# Altium PCB temperature_logger_pcb_v1.PcbDoc
Units mm, origin at the board's own origin, x right, y up, seen from the top; angles counter-clockwise.
Board outline 26.5 x 50 mm, 2 copper layers (Top Layer, Bottom Layer); 41 components, 32 nets, 188 pads, 43 vias.
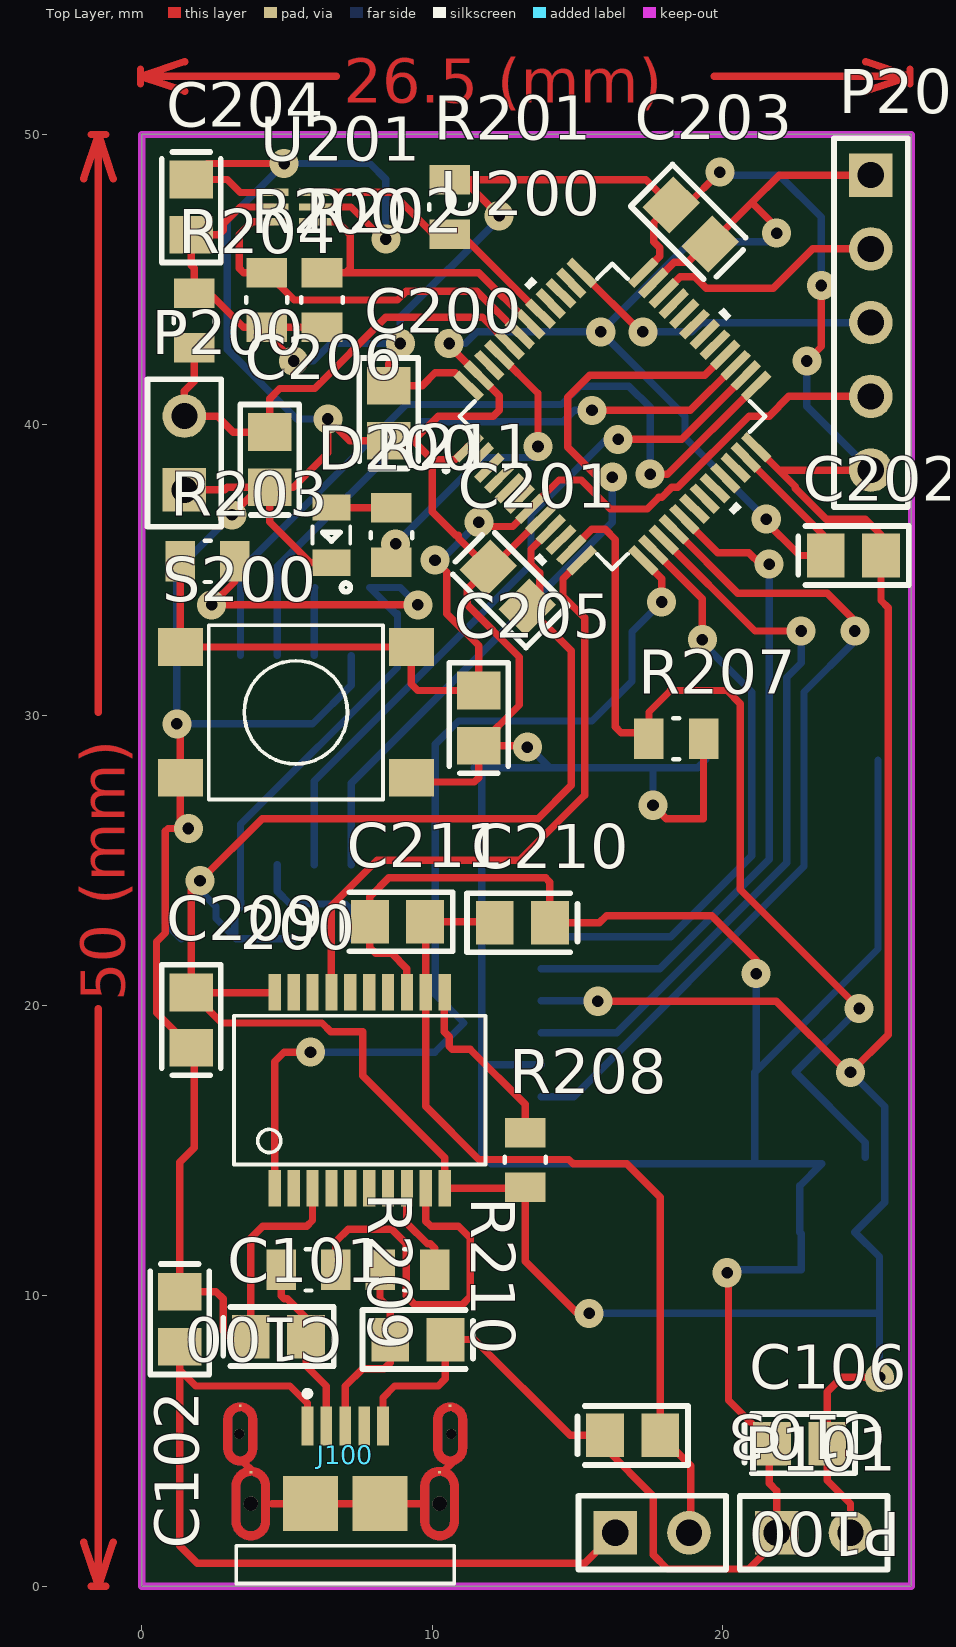
[diagram p0: Top Layer view]
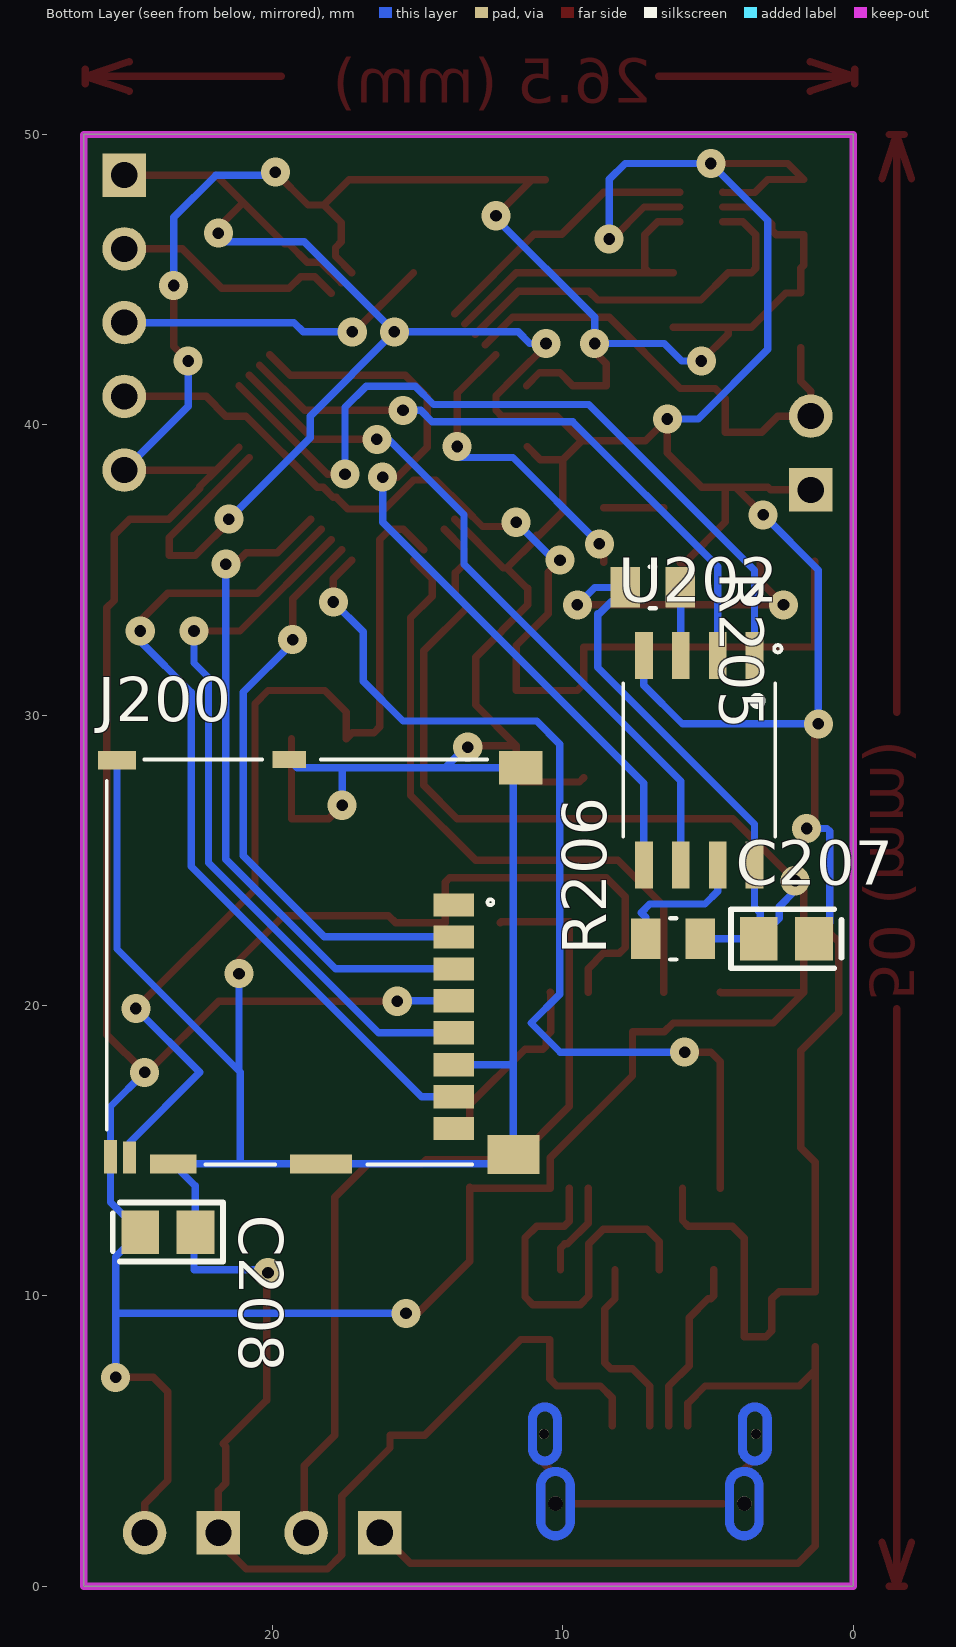
[diagram p1: Bottom Layer view, seen from below]

## Layer stack, top to bottom
Top Solder: solder mask 0.0102, Solder Resist, Dk 3.5
Top Layer: signal copper 0.0356
Dielectric 1: dielectric 0.32, FR-4, Dk 4.8
Bottom Layer: signal copper 0.0356
Bottom Solder: solder mask 0.0102, Solder Resist, Dk 3.5

## Board outline
0,0 0,50 26.5,50 26.5,0

## Design rules (kind name [scope] priority, off if disabled: settings)
Clearance [All] p1: gap=0.203 ignorepadtopadclearanceinfootprint=FALSE
PolygonConnect [All] p1: connectstyle=Relief reliefconductorwidth=0.254 reliefentries=4 polygonreliefangle="90 Angle" airgapwidth=0.254
RoutingVias [All] p1: holewidth=0.4 width=1 viastyle="Through Hole" minholewidth=0.3 minwidth=1 maxholewidth=0.711 maxwidth=1
SolderMaskExpansion [All] p1: expansion=0.102
Width [All] p1: maxlimit=0.381 minlimit=0.152 preferedwidth=0.254
30 further rules are at their usual default settings.

## Classes and differential pairs
component class 01_Power: C100 C101 C102 C103 C106 J100 P100 P101
component class 02_MCU: 200 C200 C201 C202 C203 C204 C205 C206 C207 C208 C209 C210 C211 D200 J200 P200 P201 R200 R201 R202 R203 R204 R205 R206 R207 R208 R209 R210 R211 S200 U200 U201 U202

## Components (designator, comment, footprint, x,y, rotation, side; value= is the part's Value field where it differs from the comment)
200 "FT231XS-R" SSOP20 7.5,17.089 r0 top
C100 "47 pF" C0805 9.5,8.5 r180 top
C101 "47 pF" C0805 4.7,8.6 r0 top
C102 "10 nF" C0805 1.3,9.2 r270 top
C103 "100 nF" C0805 16.9,5.2 r0 top
C106 "10 nF" C0805 22.65,4.915 r0 top
C200 "1000 pF" C0805 8.5,40.4 r90 top
C201 "1000 pF" C0805 12.6,34.4 r315 top
C202 "1000 pF" C0805 24.5,35.5 r0 top
C203 "1000 pF" C0805 18.9,46.9 r135 top
C204 "1000 pF" C0805 1.7,47.5 r270 top
C205 "1000 pF" C0805 11.6,29.9 r90 top
C206 "1000 pF" C0805 4.4,38.8 r90 top
C207 "1000 pF" C0805 2.3,22.3 r0 bottom
C208 "1000 pF" C0805 23.6,12.2 r180 bottom
C209 "100 nF" C0805 1.7,19.5 r90 top
C210 "1000 pF" C0805 13.1,22.854 r180 top
C211 "47 pF" C0805 8.802,22.889 r0 top
D200 "LGR971" D0805 6.525,36.2 r270 top value="Green LED"
J100 "USB_Micro_B" MicroUSB 7,2.85 r0 top value="USB Micro B"
J200 "MicroSD" MicroSD 18.5,21.5 r90 bottom
P100 "" HDR1X2 16.3,1.848 r0 top
P101 "" HDR1X2 21.86,1.847 r0 top
P200 "" HDR1X2 1.46,37.76 r90 top
P201 "" HDR1X5 25.1,48.6 r270 top
R200 "5 k" R0805 4.3,44.3 r90 top value=5k
R201 "5 k" R0805 10.6,47.5 r270 top value=5k
R202 "5 k" R0805 6.2,44.3 r90 top value=5k
R203 "1 k" R0805 2.265,35.3 r180 top value=1k
R204 "1 k" R0805 1.8,43.6 r270 top value=1k
R205 "1 k" R0805 6.9,34.4 r180 bottom value=1k
R206 "1 k" R0805 6.2,22.3 r0 bottom value=1k
R207 "10 k" R0805 18.4,29.189 r0 top value=10k
R208 "1 k" R0805 13.2,14.689 r90 top value=1k
R209 "27" R0805 5.737,10.9 r180 top
R210 "27" R0805 9.14,10.9 r180 top
R211 "1 k" R0805 8.592,36.2 r270 top value=1k
S200 "Switch_tactile" Tactile1 5.3,30.1 r180 top value=Switch_Tactile
U200 "STM32L053" LQFP48-7x7mm 16.2,40.289 r45 top value=STM32L053C8T6
U201 "TMP112" SOT563 5.225,47.5 r180 top value=TMP112AIDRLT
U202 "16MB_FLASH" 8-SOIC 5.3,28.45 r270 bottom value=MX25R1635FM2IH1

## Footprints (in the part's own frame and the unit in brackets; to place one, negate y for a bottom-side part, rotate by r counter-clockwise, add the part's x,y. Pads: shape width x height; smd on the part's side, far side on the other; paste and mask are expansions set on the pad)
8-SOIC [mm]
  rect 1.61x0.61 smd: 1(-3.605,1.905) 2(-3.605,0.635) 3(-3.605,-0.635) 4(-3.605,-1.905) 5(3.605,-1.905) 6(3.605,-0.635) 7(3.605,0.635) 8(3.605,1.905)
  silkscreen extent -3.97,-2.62 2.64,2.83
C0805 [mm] "Chip Capacitor; Body 2.0 x 1.2 mm (LxW typ)"
  rect 1.3x1.5 smd: 1(-0.95,0) 2(0.95,0)
  silkscreen extent -1.9,-1.02 1.91,1.02
D0805 [mm]
  rect 0.9x1.3 smd: A(-0.95,0) C(0.95,0)
  silkscreen extent -0.3,-0.65 1.95,0.65
HDR1X2 [mm] "Connector; Header; 2 Position"
  rect 1.5x1.5 hole 0.9: 1(0,0)
  round 1.5 hole 0.9: 2(2.54,0)
  silkscreen extent -1.27,-1.27 3.81,1.27
HDR1X5 [mm] "Connector; Header; 5 Position"
  rect 1.5x1.5 hole 0.9: 1(0,0)
  round 1.5 hole 0.9: 2(2.54,0) 3(5.08,0) 4(7.62,0) 5(10.16,0)
  silkscreen extent -1.27,-1.27 11.43,1.27
LQFP48-7x7mm [mm]
  rect 1.194x0.305 smd: 1(-4.25,2.75) 2(-4.25,2.25) 3(-4.25,1.75) 4(-4.25,1.25) 5(-4.25,0.75) 6(-4.25,0.25) 7(-4.25,-0.25) 8(-4.25,-0.75) 9(-4.25,-1.25) 10(-4.25,-1.75) 11(-4.25,-2.25) 12(-4.25,-2.75) 25(4.25,-2.75) 26(4.25,-2.25) 27(4.25,-1.75) 28(4.25,-1.25) 29(4.25,-0.75) 30(4.25,-0.25) 31(4.25,0.25) 32(4.25,0.75) 33(4.25,1.25) 34(4.25,1.75) 35(4.25,2.25) 36(4.25,2.75)
  rect 0.305x1.194 smd: 13(-2.75,-4.25) 14(-2.25,-4.25) 15(-1.75,-4.25) 16(-1.25,-4.25) 17(-0.75,-4.25) 18(-0.25,-4.25) 19(0.25,-4.25) 20(0.75,-4.25) 21(1.25,-4.25) 22(1.75,-4.25) 23(2.25,-4.25) 24(2.75,-4.25) 37(2.75,4.25) 38(2.25,4.25) 39(1.75,4.25) 40(1.25,4.25) 41(0.75,4.25) 42(0.25,4.25) 43(-0.25,4.25) 44(-0.75,4.25) 45(-1.25,4.25) 46(-1.75,4.25) 47(-2.25,4.25) 48(-2.75,4.25)
  silkscreen extent -5.43,-5.35 5.35,5.35, body extent 0,0 0.25,0.25, height 0.25
MicroSD [mm]
  rect 0.8x1.4 smd: 1(1.965,-4.75) 2(0.865,-4.75) 3(-0.235,-4.75) 4(-1.335,-4.75) 5(-2.435,-4.75) 6(-3.535,-4.75) 7(-4.635,-4.75) 8(-5.735,-4.75)
  rect 1.15x0.45 smd: 9(-6.7,7.075)
  rect 1.1x0.45 smd: 10(-6.725,6.415)
  rect 1.35x1.8 smd: 11(-6.625,-6.8)
  rect 0.65x2.14 smd: 12(-6.95,-0.17)
  rect 0.65x1.6 smd: 13(-6.95,4.91)
  rect 0.65x1.3 smd: 14(6.95,6.85)
  rect 0.6x1.15 smd: 15(6.975,0.925)
  rect 1.16x1.5 smd: 16(6.695,-7.05)
  silkscreen extent -6.98,-6.11 6.98,7.2
MicroUSB [mm]
  rect 0.4x1.35 smd: 1(-1.3,2.675) 2(-0.65,2.675) 3(0,2.675) 4(0.65,2.675) 5(1.3,2.675)
  round 0.35 hole 0.35 unplated: None(-3.65,2.4) None(3.65,2.4)
  round 0.5 hole 0.5 unplated: None(-3.25,0) None(3.25,0)
  rect 0.1x0.1 smd: S1(-3.25,1.08) S2(3.25,1.08) S3(-3.615,3.369) S6(3.615,3.369)
  rect 1.9x1.9 smd: S4(-1.2,0) S5(1.2,0)
  Top Layer region: 258 vertices and 0 holes, not listed, extent -3.91,-1.26 -2.59,1.26
  Top Layer region: 258 vertices and 0 holes, not listed, extent 2.59,-1.26 3.91,1.26
  Top Layer region: 258 vertices and 0 holes, not listed, extent -4.195,1.32 -3.035,3.48
  Top Layer region: 258 vertices and 0 holes, not listed, extent 3.035,1.32 4.195,3.48
  Bottom Layer region: 258 vertices and 0 holes, not listed, extent -3.91,-1.26 -2.59,1.26
  Bottom Layer region: 258 vertices and 0 holes, not listed, extent 2.59,-1.26 3.91,1.26
  Bottom Layer region: 258 vertices and 0 holes, not listed, extent -4.195,1.32 -3.035,3.48
  Bottom Layer region: 258 vertices and 0 holes, not listed, extent 3.035,1.32 4.195,3.48
  silkscreen extent -3.75,-2.75 3.75,3.89
R0805 [mil]
  rect 40x55 smd: 1(-37,0) 2(37,0)
  silkscreen extent -4,-28 4,28
SOT563 [mil]
  rect 44x10 smd: 1(-29,20) 2(-29,0) 3(-29,-20) 4(29,-20) 5(29,0) 6(29,20)
SSOP20 [mm]
  rect 0.42x1.25 smd: P$1(-2.925,-3.375) P$2(-2.275,-3.375) P$3(-1.625,-3.375) P$4(-0.975,-3.375) P$5(-0.325,-3.375) P$6(0.325,-3.375) P$7(0.975,-3.375) P$8(1.625,-3.375) P$9(2.275,-3.375) P$10(2.925,-3.375) P$11(2.925,3.375) P$12(2.275,3.375) P$13(1.625,3.375) P$14(0.975,3.375) P$15(0.325,3.375) P$16(-0.325,3.375) P$17(-0.975,3.375) P$18(-1.625,3.375) P$19(-2.275,3.375) P$20(-2.925,3.375)
  silkscreen extent -4.33,-2.56 4.33,2.56
Tactile1 [mm] "6 mm x 6 mm"
  rect 1.55x1.3 smd: 1(-3.975,2.25) 2(3.975,2.25) 3(-3.975,-2.25) 4(3.975,-2.25)
  silkscreen extent -3,-3 3,3

## Part data
200: "USB Full Speed to Full Handshake UART with USB Charger Detection", Package="SSOP-20 FTDI", Availability=Good, MF=FTDI,, MP=FT231XS-R, Price="1.80 USD", SnapEDA_Link=https://www.snapeda.com/parts/FT231XS-R/FTDI%2C%20Future%20Technology%20Devices%20International%20Ltd/view-part/?ref=snap
C100 C101 C211: library part Cap-47pF, "CAP CER 47PF 1KV C0G/NP0 0805", Manufacturer=KEMET, Manufacturer Part Number=C0805C470JDGACTU, Package=C0805, Digikey_link=https://www.digikey.com.au/product-detail/en/kemet/C0805C470JDGACTU/399-7157-1-ND/3439404, Price="0.62 AUD"
C102 C106: library part Cap-10nF, "CAP CER 10000PF 10V X7R 0805", Manufacturer="Wurth Electronics Inc.", Manufacturer Part Number=885012207011, Package=C0805, Digikey_link=https://www.digikey.com.au/product-detail/en/wurth-electronics-inc/885012207011/732-8021-1-ND/5454648, Price="0.15 AUD"
C103 C209: library part Cap-100nF, "CAP CER 0.1UF 50V X7R 0805", Manufacturer=KEMET, Manufacturer Part Number=C0805X104K5RACTU, Package=C0805, Digikey_link=https://www.digikey.com.au/product-detail/en/kemet/C0805X104K5RACTU/399-5330-1-ND/1842309, Price="0.46 AUD"
C200 C201 C202 C203 C204 C205 C206 C207 C208 C210: library part Cap-1000pF, "CAP CER 1000PF 100V X7R 0805", Manufacturer=KEMET, Manufacturer Part Number=C0805C102K1RACTU, Package=C0805, Digikey_link=https://www.digikey.com.au/product-detail/en/kemet/C0805C102K1RACTU/399-1148-2-ND/411147, Price="0.035 USD"
D200: "LED GREEN DIFFUSED 0805 SMD", Manufacturer="Osram Opto", Manufacturer Part Number="LG R971-KN-1", Package=LED0805, Digikey_link=https://www.digikey.com.au/product-detail/en/osram-opto-semiconductors-inc/LG-R971-KN-1/475-1410-2-ND/1227925, Price="0.09 USD"
J100: "USB - micro B USB 2.0 Receptacle Connector 5 Position Surface Mount, Right Angle; Through Hole", Manufacturer="TE Connectivity", Manufacturer Part Number=2040002-1, Package=USB-Micro-B, Digikey_link=https://www.digikey.com.au/product-detail/en/te-connectivity-amp-connectors/2040002-1/A108263CT-ND/4021990, Price="3.03 USD", Product_Type=Connector
J200: "MICRO SD PUSH PUSH LOW PROFILE TYPE", Manufacturer="TE Connectivity", Manufacturer Part Number=2201778-1, Digikey_link=https://www.digikey.com.au/product-detail/en/te-connectivity-amp-connectors/2201778-1/A118117CT-ND/4729820, Package=MicroSD, Price="3.61 USD", Product_Type="Removable Memory Products"
P100 P101 P200: library part "Header 2", "Header, 2-Pin", LatestRevisionDate=17-Jul-2002, LatestRevisionNote="Re-released for DXP Platform.", Publisher="Altium Limited"
P201: library part "Header 5", "Header, 5-Pin", LatestRevisionDate=17-Jul-2002, LatestRevisionNote="Re-released for DXP Platform.", Publisher="Altium Limited"
R200 R201 R202: library part Res-5k, "RES SMD 4.7K OHM 0.1% 1/8W 0805", Manufacturer="Panasonic Electronic Components", Manufacturer Part Number=ERA-6AEB472V, Package=R0805, Digikey_link=https://www.digikey.com.au/product-detail/en/panasonic-electronic-components/ERA-6AEB472V/P4.7KDACT-ND/1465963, Price="0.51 AUD"
R203 R204 R205 R206 R208 R211: library part Res-1k, "RES 1K OHM 0.1% 1/5W 0805", Manufacturer="Vishay Dale", Manufacturer Part Number=TNPW08051K00BEEA, Package=R0805, Digikey_link=https://www.digikey.com.au/product-detail/en/vishay-dale/TNPW08051K00BEEA/TNP1.00KABTR-ND/1607282, Price="0.03 USD"
R207: library part Res-10k, "RES SMD 10K OHM 0.1% 1/8W 0805", Manufacturer="Panasonic Electronic Components", Manufacturer Part Number=ERA-6AEB103V, Package=R0805, Digikey_link=https://www.digikey.com/product-detail/en/panasonic-electronic-components/ERA-6AEB103V/P10KDACT-ND/1465971, Price="0.36 AUD"
R209 R210: library part Res-27, "RES SMD 27 OHM 5% 1/8W 0805", Manufacturer="Panasonic Electronic Components", Manufacturer Part Number=ERJ-6GEYJ270V, Package=R0805, Digikey_link=https://www.digikey.com.au/product-detail/en/panasonic-electronic-components/ERJ-6GEYJ270V/P27ACT-ND/42810, Price="0.11 AUD"
S200: "SWITCH TACTILE SPST-NO 0.05A 12V", Manufacturer="C&K Components", Manufacturer Part Number=PTS645SM43SMTR, Package=6x6, Digikey_link=https://www.digikey.com.au/product-detail/en/c-k/PTS645SM43SMTR92-LFS/CKN9112CT-ND/1146934, Price="0.22 USD"
U200: library part STM32L0x3CL4, "IC MCU 32BIT 64KB FLASH 48LQFP", Manufacturer=STMicroelectronics, Manufacturer Part Number=STM32L053C8T6, Package=48LQFP, Digikey_link=https://www.digikey.com.au/product-detail/en/stmicroelectronics/STM32L053C8T6/497-14906-ND/4935255, Price="5.66 AUD"
U201: library part TMP112AIDRLT, "1.4V-Capable ?0.5?C Temperature Sensor with Alert Function and I2C/SMBus interface in SOT-563 6-SOT -40 to 125", Manufacturer="Texas Instruments", Package=SOT-563, Digikey_link=https://www.digikey.com/product-detail/en/texas-instruments/TMP112AIDRLR/296-38578-2-ND/2232593, Manufacturer Part Number=TMP112AIDRLT, Price="1 USD"
U202: library part MX25R1635, "IC FLASH 16M SPI 80MHZ 8SOP", Manufacturer=Macronix, Manufacturer Part Number=MX25R1635FM2IL0, Package=SOP-8, Digikey_link=https://www.digikey.com/product-detail/en/macronix/MX25R1635FM2IH1/1092-1176-ND/5957737, Price="0.97 USD"

## Via types
v1: diameter 1, hole 0.4, Top Layer to Bottom Layer, 43 vias

## Nets (pads, with @x,y where several pads share a name; then routed paths per layer and width w, separated by ;. In a path a pad name is that pad's centre, name@x,y a point inside that pad or via, vN(x,y) a via of type N, cw(c..) or ccw(c..) an arc to the next point about the centre after c; other vN are vias at no path point)
3V: 200.P$10 200.P$20 C106.2 C200.2 C201.2 C202.2 C203.2 C204.2 C207.2 C208.1 C209.2 J200.4 J200.9 P101.2 P201.5 R200.1 R201.1 R202.1 R203.1 R204.1 R205.1 R206.1 R208.1 U200.9 U200.24 U200.36 U200.48 U201.5 U202.8 | length 206.6
  Top Layer w0.254: R203.1 3.205,34.605 v1(2.4,33.8) v1(9.5,33.8) ; U201.5 3.385,47.5 2.8,46.915 2.8,46.7 2.65,46.55 C204.2 1.7,45.49 1.8,45.39 R204.1 2.32,44.54 3.5,43.36 R200.1 ; 200.P$20 4.55,20.439 C209.2@1.711,20.439 ; v1(5.225,42.2) 4.3,43.125 R200.1 ; R202.1 R200.1 ; v1(8.9,42.8) 9.2,42.8 8.5,42.1 C200.2 9.65,41.35 10.1,41.8 10.8,41.8 U200.48 ; R201.1 R201.1@11.06,48.44 ; v1(12.3,47.2) R201.1@11.06,48.44 ; U200.9 13.4,35.721 13.4,35.2 13.7,34.9 13.7,34.156 C201.2 14.786,32.214 14.786,27.586 13.64,26.44 4.14,26.44 v1(2,24.3) 1.7,24 C209.2 C209.2@1.711,20.439 ; v1(15.4,9.4) 15.2,9.2 13.2,11.2 R208.1 13.165,13.714 200.P$10 10.425,14.765 7.6,17.59 7.6,19.1 6.5,19.1 6.2,19.4 2.75,19.4 C209.2@1.711,20.439 ; v1(15.7,20.15) 21.85,20.15 24.3,17.7 v1(24.4,17.7) 25.7,19 25.7,33.7 25.45,33.95 C202.2 25.45,36.219 24.915,36.754 23.564,36.754 22.5,37.818 22.5,37.878 21.938,38.44 ; U200.36 17.828,45.806 17.828,46.1 17.626,46.303 17.626,46.969 C203.2 ; v1(19.9,48.7) 18.772,47.572 C203.2 ; U200.24 21.938,38.44 ; v1(22.9,42.2) 23.4,42.7 v1(23.4,44.8) ; P101.2 24.4,2.847 23.6,3.647 C106.2 23.6,6.7 24.1,7.2 v1(25.4,7.2) ; P201.5 21.938,38.44 ; R201.1@11.06,48.44 17.36,48.44 C203.2
  Bottom Layer w0.254: v1(2,24.3) 2,23.95 2.55,23.4 2.55,23 C207.2@3.2,22.35 ; v1(5.225,42.2) 5.9,42.2 6.5,42.8 v1(8.9,42.8) 8.9,43.7 12.3,47.1 v1(12.3,47.2) ; R206.1 C207.2 C207.2@3.2,22.35 ; v1(9.5,33.8) 8.9,34.4 R205.1 8.74,33.5 8.8,33.5 8.8,31.645 3.395,26.24 U202.8 3.395,23.603 3.398,23.6 3.398,23.398 3.2,23.2 C207.2@3.2,22.35 ; J200.4 15.685,20.165 v1(15.7,20.15) ; v1(15.4,9.4) 25.4,9.4 ; v1(19.9,48.7) 20,48.6 21.944,48.6 23.4,47.144 v1(23.4,44.8) ; v1(22.9,42.2) 22.9,40.64 P201.5 ; v1(24.4,17.7) 25.575,16.525 J200.9 25.575,13.225 C208.1 25.4,11.35 25.4,9.4 ; v1(25.4,7.2) 25.4,9.4
5V: 200.P$12 C103.2 C210.2 C211.2 P100.2 | length 30.2
  Top Layer w0.254: C210.2 12.115,22.889 C211.2 9.775,22.866 200.P$12 9.775,16.529 11.604,14.7 14.7,14.7 14.85,14.55 16.7,14.55 17.85,13.4 C103.2 18.9,4.15 18.9,1.908 P100.2
ALERT: R201.2 U200.41 U201.3 | length 9.5
  Top Layer w0.254: U201.3 8.592,48.008 10.04,46.56 R201.2 10.99,46.56 U200.41
BOOT0: C206.2 P200.2 R204.2 U200.44 | length 16.6
  Top Layer w0.254: R204.2 1.8,41.5 1.46,41.16 P200.2 2.6,40.3 3.15,39.75 C206.2 4.4,40.9 4.75,41.25 5.95,41.25 8.4,43.7 11.728,43.7 U200.44
CARD_DETECT: J200.10 R207.1 U200.11 | length 33.5
  Top Layer w0.254: U200.11 15.493,36.4 15.95,36.4 16.3,36.05 16.3,29.6 16.5,29.4 17.249,29.4 R207.1 17.46,30.11 18.2,30.85 20.15,30.85 20.6,30.4 20.6,24 v1(24.7,19.9)
  Bottom Layer w0.254: v1(24.7,19.9) 22.5,17.7 24.915,15.285 J200.10
FLASH_CSN: U200.25 U202.1 | length 27.3
  Top Layer w0.254: v1(17.5,38.3) 18.1,38.3 U200.25
  Bottom Layer w0.254: U202.1 3.395,34.995 9.1,40.7 14.449,40.7 15.079,41.33 16.77,41.33 17.5,40.6 v1(17.5,38.3) v1@17.352,38.3
FLASH_MISO: U200.27 U202.2 | length 21.8
  Top Layer w0.254: v1@15.414,40.5 v1(15.5,40.5) 18.886,40.5 U200.27
  Bottom Layer w0.254: U202.2 4.665,35.115 9.65,40.1 14.496,40.1 14.896,40.5 v1(15.5,40.5)
FLASH_MOSI: U200.28 U202.5 | length 26.8
  Top Layer w0.254: v1(16.2,38.2) 15.7,38.2 14.67,39.23 14.67,40.95 15.423,41.703 19.382,41.703 U200.28
  Bottom Layer w0.254: U202.5 7.205,27.655 16.2,36.65 v1(16.2,38.2)
FLASH_SCLK: U200.26 U202.6 | length 25.2
  Top Layer w0.254: U200.26 18.593,39.5 v1(16.4,39.5) ; v1(16.4,39.5) 16.4,39.7 16.2,39.5 v1(16.4,39.5)
  Bottom Layer w0.254: U202.6 5.935,27.735 13.4,35.2 13.4,36.9 16,39.5 v1(16.4,39.5)
FT_RX: 200.P$1 U200.13 | length 34
  Top Layer w0.254: 200.P$1 4.575,18.075 4.9,18.4 v1(5.804,18.4) ; U200.13 17.9,34.7 v1(17.9,33.9)
  Bottom Layer w0.254: v1(5.804,18.4) 10.093,18.4 11.093,19.4 10.1,20.393 10.1,29 10.9,29.8 15.5,29.8 16.875,31.175 16.875,32.875 v1(17.9,33.9)
FT_TX: 200.P$17 U200.12 | length 21.9
  Top Layer w0.254: 200.P$17 6.525,23.429 8.096,25 13,25 15.243,27.243 15.243,33.357 14.5,34.1 14.5,34.7 U200.12
GND: 200.P$3 200.P$13 C100.1 C101.1 C102.1 C103.1 C106.1 C200.1 C201.1 C202.1 C203.1 C204.1 C205.1 C206.1 C207.1 C208.2 C209.1 C210.1 C211.1 D200.C J100.5 J200.6 J200.11 J200.12 J200.13 J200.14 J200.15 J200.16 P101.1 P200.1 P201.1 R207.2 S200.1 S200.2 U200.1 U200.8 U200.23 U200.35 U200.47 U201.2 U201.4 U202.4 | length 281.9
  Top Layer w0.254: v1(1.2,29.7) 1.325,29.575 S200.2 1.325,26.375 v1(1.6,26.1) 0.9,26.1 0.8,26 0.8,22.5 0.5,22.2 0.5,19.75 C209.1 1.8,18.45 1.8,15.1 1.3,14.6 C102.1 2.55,10.15 2.8,9.9 2.8,8.8 3,8.6 C101.1 3.75,11.985 4.165,12.4 5.675,12.4 5.875,12.6 200.P$3 ; P200.1 2.846,37.76 2.936,37.85 C206.1@4.05,37.85 ; v1(3.1,36.9) C206.1@4.05,37.85 ; U201.4 4.48,48 3.385,48 2.935,48.45 C204.1 2.25,49 v1(4.9,49) ; D200.C@5.962,35.25 5.804,35.25 4.4,36.654 C206.1 ; U201.2 7.2,47.5 8.3,46.4 v1(8.4,46.4) ; J100.5 8.3,6.5 8.7,6.9 10.201,6.9 10.45,7.149 C100.1 11.45,8.5 14.75,5.2 C103.1 15.95,4.764 17.614,3.1 17.614,1.086 18.1,0.6 20.9,0.6 21.86,1.56 P101.1 21.86,3.287 21.6,3.547 21.6,4.815 C106.1 20.2,6.415 20.2,10.8 v1(20.15,10.8) ; 200.P$13 9.125,21.275 8.6,21.8 8.052,21.8 7.852,22 C211.1 7.852,23.752 8.5,24.4 13.9,24.4 14.05,24.25 C210.1 15.754,22.854 16,23.1 19.618,23.1 21.15,21.569 v1(21.15,21.1) ; S200.1 9.425,27.7 11.45,27.7 11.6,27.85 C205.1 ; v1(10.578,42.8) 10.578,42.729 U200.47 12.3,41.007 12.3,40.5 12.1,40.3 10.2,40.3 9.35,39.45 ; U200.1@11.227,39.252 10.775,38.8 10,38.8 ; v1(13.272,28.9) 13.222,28.95 C205.1 ; U200.8 12.043,35.072 C201.1 ; v1@15.6,43 v1(15.8,43.2) ; v1(17.6,26.9) 18.06,26.44 19.34,26.44 R207.2 ; U200.35@17.626,44.885 U200.35 18.329,45.6 18.8,45.6 19.428,46.228 C203.1 21,47.656 ; U200.23 23.55,36.121 C202.1 22.654,35.5 21.4,36.754 v1(21.5,36.754) ; v1(21.86,46.6) 21.86,46.797 21,47.656 ; P201.1 21.944,48.6 21,47.656 ; C206.1@4.05,37.85 C206.1 ; C206.1 5.218,37.85 6.4,39.032 v1(6.4,40.2) 7.15,39.45 C200.1 9.35,39.45 ; 9.35,39.45 10,38.8 ; 10,38.8 10,37.004 10.804,36.2 10.9,36.2 10.9,36.1 C201.1 ; C205.1 13,30.35 13,32 11.2,33.8 11.2,34.375 11.231,34.375 C201.1
  Bottom Layer w0.254: C207.1 0.8,22.85 0.8,26 0.9,26.1 v1(1.6,26.1) ; v1(3.1,36.9) 1.2,35 v1(1.2,29.7) 5.875,29.7 7.205,31.03 U202.4 ; v1(6.4,40.2) 5.335,40.2 2.935,42.6 2.935,47.035 v1(4.9,49) 7.852,49 8.4,48.452 v1(8.4,46.4) ; v1(10.578,42.8) 11.136,42.8 11.536,43.2 v1(15.8,43.2) ; v1(13.272,28.9) 13.345,28.9 14.05,28.195 ; J200.6 11.735,17.965 11.7,18 ; v1(17.6,26.9) 17.6,28.195 ; J200.15 19.145,28.195 17.6,28.195 ; v1(20.15,10.8) 20.25,10.9 22.7,10.9 22.7,12.15 C208.2 22.65,13.79 J200.13 21.1,14.55 ; v1(21.15,21.1) 21.15,17.75 ; v1(21.5,36.754) 18.7,39.554 18.7,40.3 v1(15.8,43.2) ; v1(21.86,46.6) 21.86,46.563 21.6,46.303 18.903,46.303 v1(15.8,43.2) ; J200.14 25.35,21.95 21.15,17.75 ; 11.7,18 J200.11 12.025,14.55 J200.12 21.1,14.55 ; 11.7,18 11.7,27.945 J200.16 14.05,28.195 ; 14.05,28.195 17.6,28.195 ; 21.1,14.55 21.1,17.7 21.15,17.75
I2C_SCL: R202.2 U200.42 U201.1 | length 10.7
  Top Layer w0.254: U201.1 6.725,46.992 7.175,46.542 7.175,45.39 7.025,45.24 ; R202.2 7.025,45.24 ; U200.42 11.603,45.24 7.025,45.24
I2C_SDA: R200.2 U200.43 U201.6 | length 13.3
  Top Layer w0.254: U201.6 3.8,46.992 3.35,46.542 3.35,45.39 3.5,45.24 R200.2 5.24,44.3 8.8,44.3 9.1,44.6 11.536,44.6 U200.43
MICROSD_CLK: J200.5 U200.15 | length 25.1
  Top Layer w0.254: U200.15 21.114,32.9 v1(22.7,32.9)
  Bottom Layer w0.254: J200.5 16.347,19.065 22.2,24.918 22.2,31.3 22.7,31.8 v1(22.7,32.9)
MICROSD_CS: J200.2 U200.14 | length 20.3
  Top Layer w0.254: U200.14 19.3,34.007 v1(19.3,32.6)
  Bottom Layer w0.254: J200.2 18.21,22.365 21,25.155 21,30.8 19.3,32.5 v1(19.3,32.6)
MICROSD_DI: J200.3 U200.17 | length 23.1
  Top Layer w0.254: U200.17 19.828,35.6 20.9,35.6 21.3,35.2 v1(21.6,35.2)
  Bottom Layer w0.254: J200.3 17.828,21.265 21.6,25.037 v1(21.6,35.2)
MICROSD_DO: J200.7 U200.16 | length 29
  Top Layer w0.254: U200.16 20.521,34.2 23.6,34.2 24.5,33.3 24.5,32.95 v1(24.55,32.9)
  Bottom Layer w0.254: J200.7 14.865,16.865 22.8,24.8 22.8,30.8 24.55,32.55 v1(24.55,32.9)
Net200_P$8: 200.P$8 R210.1 | length 3.3
  Top Layer w0.254: 200.P$8 9.125,12.51 9.835,11.8 9.925,11.8 10.08,11.645 R210.1
Net200_P$9: 200.P$9 R209.1 | length 12.9
  Top Layer w0.254: R209.1 6.676,11.876 7.1,12.3 8.6,12.3 9.1,11.8 9.1,10 9.4,9.7 11.028,9.7 11.3,9.972 11.3,12 10.9,12.4 9.953,12.4 9.775,12.578 200.P$9
Net200_P$11: 200.P$11 R208.2 | length 6.4
  Top Layer w0.254: 200.P$11 10.407,20.446 10.407,19.1 10.578,18.929 10.578,18.6 10.678,18.5 11.3,18.5 13.2,16.6 R208.2
NetC102_2: C102.2 J100.1 P100.1 | length 28.2
  Top Layer w0.254: C102.2 1.3,7.45 ; J100.1 5.7,6.3 5.1,6.9 1.85,6.9 1.3,7.45 ; P100.1 15.252,0.8 1.9,0.8 1.3,1.4 1.3,7.45
NetD200_A: D200.A R211.1 | length 2.1
  Top Layer w0.254: D200.A 8.582,37.15 R211.1
NetR205_2: R205.2 U202.3 | length 2.4
  Bottom Layer w0.254: U202.3 5.935,34.375 R205.2
NetR206_2: R206.2 U202.7 | length 4.8
  Bottom Layer w0.254: U202.7 4.665,23.935 5.1,23.5 7,23.5 7.3,23.2 7.14,23.04 R206.2
NRST: C205.2 P201.4 R203.2 S200.3 S200.4 U200.7 | length 38
  Top Layer w0.254: R203.2 S200.4 S200.3 9.275,31.075 9.5,30.85 C205.2 11.6,32.4 10.5,33.5 10.5,34.932 v1(10.093,35.339) ; v1(11.605,36.646) 11.75,36.5 12.764,36.5 U200.7 14.364,38.1 15.126,38.1 16.126,37.1 17.4,37.1 17.8,37.5 17.9,37.5 18.25,37.85 18.456,37.85 20.906,40.3 21.6,40.3 22.28,40.98 P201.4
  Bottom Layer w0.254: v1(10.093,35.339) 10.298,35.339 v1(11.605,36.646)
SHIELD_GND: J100.S1 J100.S2 J100.S3 J100.S4 J100.S5 J100.S6 | length 6.2
  Top Layer w0.254: 3.478,4.302 3.85,3.93 ; 4.481,2.85 J100.S4 J100.S5 9.69,2.85 ; 10.35,3.93 10.7,4.28
SWCLK: P201.3 U200.37 | length 10.9
  Top Layer w0.254: U200.37 17.178,43.2 v1(17.249,43.2)
  Bottom Layer w0.254: v1(17.249,43.2) 18.936,43.2 19.256,43.52 P201.3
SWDIO: P201.2 U200.34 | length 8.1
  Top Layer w0.254: U200.34 18.536,45.1 19.028,45.1 19.428,44.7 21.74,44.7 23.1,46.06 P201.2
USB_DM: C101.2 J100.2 R209.2 | length 6.1
  Top Layer w0.254: R209.2 4.797,10.003 4.9,9.9 5,9.9 5.65,9.25 C101.2 5.65,7.6 6.35,6.9 J100.2
USB_DP: C100.2 J100.3 R210.2 | length 6.6
  Top Layer w0.254: J100.3 7,6.9 7.6,7.5 8.35,7.5 8.55,7.7 C100.2 8.55,9.55 8.2,9.9 R210.2
USER_LED: R211.2 U200.45 | length 10.9
  Top Layer w0.254: R211.2 8.592,35.752 v1(8.74,35.9) ; U200.45 13.64,41.082 v1(13.64,39.252)
  Bottom Layer w0.254: v1(8.74,35.9) 11.715,38.875 13.64,38.875 v1(13.64,39.252)
pads on no net: 200.P$2 200.P$4 200.P$5 200.P$6 200.P$7 200.P$14 200.P$15 200.P$16 200.P$18 200.P$19 J100.4 J100.None J200.1 J200.8 U200.2 U200.3 U200.4 U200.5 U200.6 U200.10 U200.18 U200.19 U200.20 U200.21 U200.22 U200.29 U200.30 U200.31 U200.32 U200.33 U200.38 U200.39 U200.40 U200.46
copper on no net: | length 68.2
  Top Layer w0.254: -2.008,1.524 -1.5,0 ; -2.008,48.476 -1.5,50 ; -1.754,0 -1.246,0 ; -1.754,50 -1.246,50 ; -1.5,19.896 -1.5,0 ; -1.5,30.104 -1.5,50 ; -0.992,1.524 -1.5,0 ; -0.992,48.476 -1.5,50 ; -0.05,51.746 -0.05,52.254 ; 1.474,51.492 -0.05,52 ; 1.474,52.508 -0.05,52 ; 6.699,52 -0.05,52 ; 19.7,52 26.45,52 ; 24.926,51.492 26.45,52 ; 24.926,52.508 26.45,52 ; 26.45,51.746 26.45,52.254

## Keep-outs
Keep-Out Layer:
  the board outline again, w0.254

## Other copper
Top Layer:
  text "26.5 (mm)" at 6.953,51.086 h1.52
  text "50 (mm)" at -0.586,20.15 h1.52 r90

## Text inside footprints (layer, text, board x,y; h text height)
J100: Mechanical 1 "PCB EDGE" at 0.523,-2.611 h1.88